# EAGLE board PCB v45 (EAGLE 9.7.0)
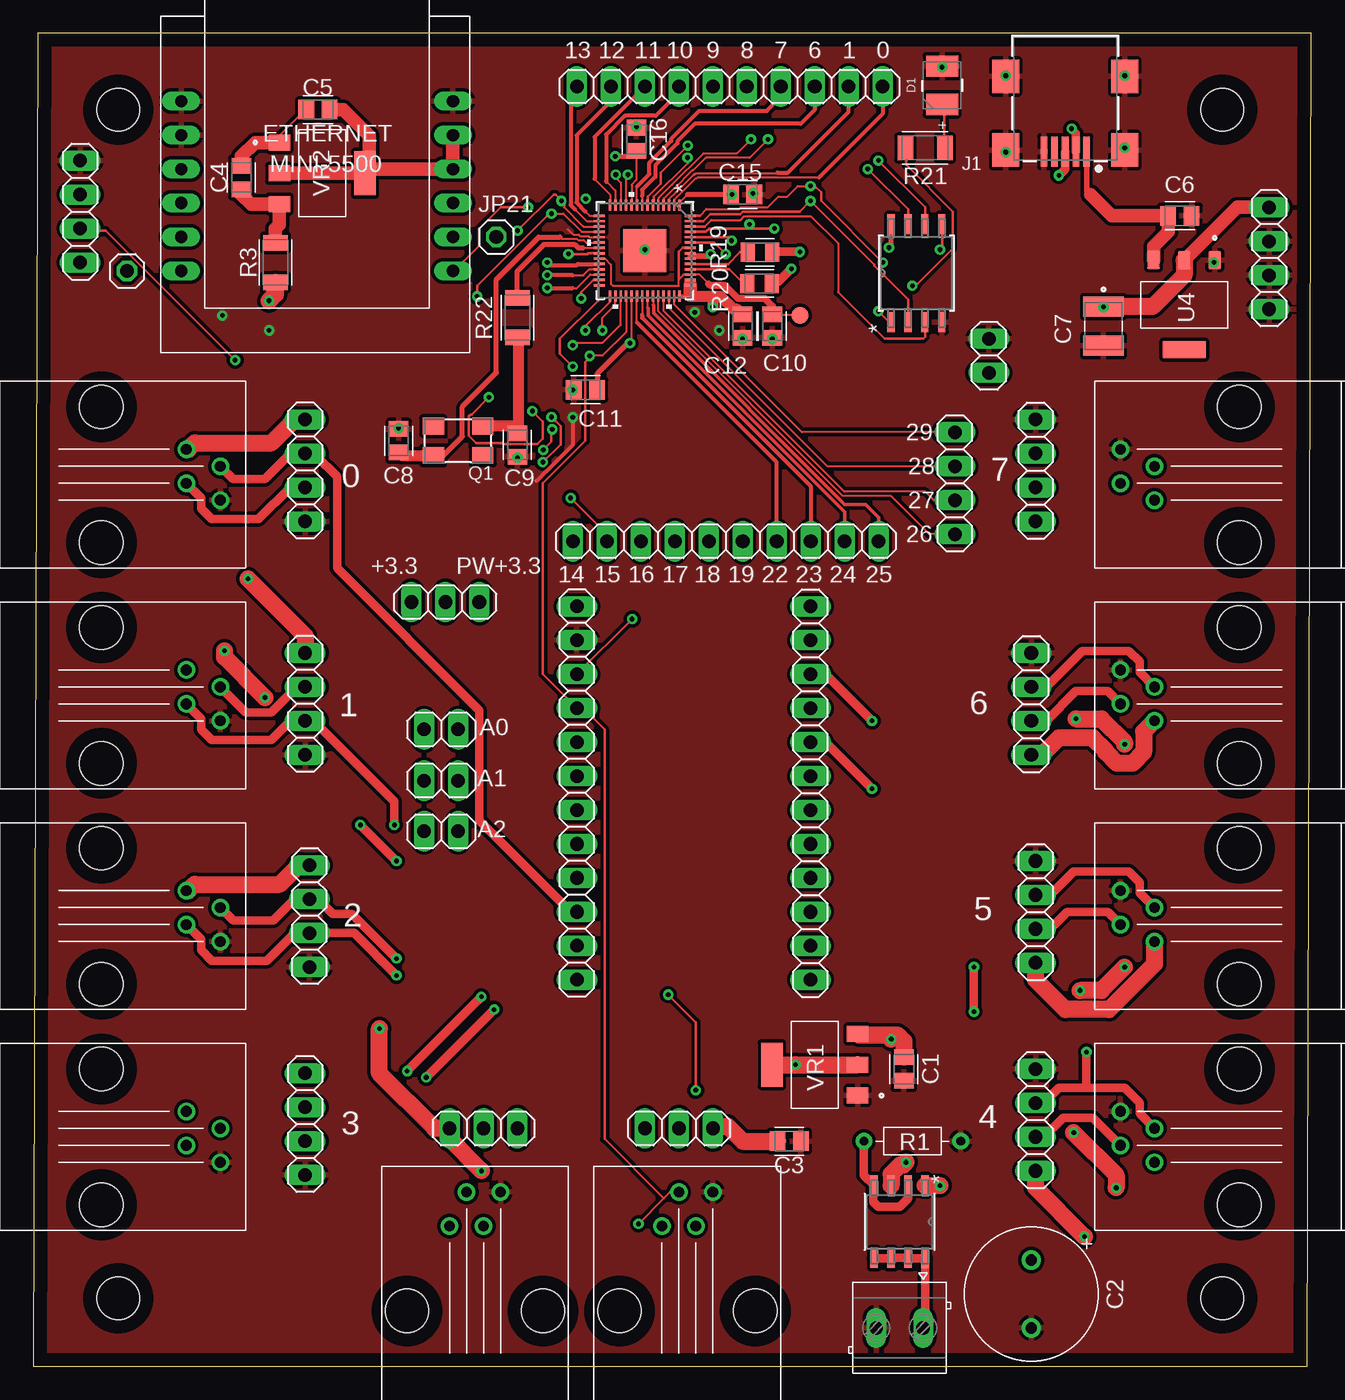
[diagram p0: board, top side]
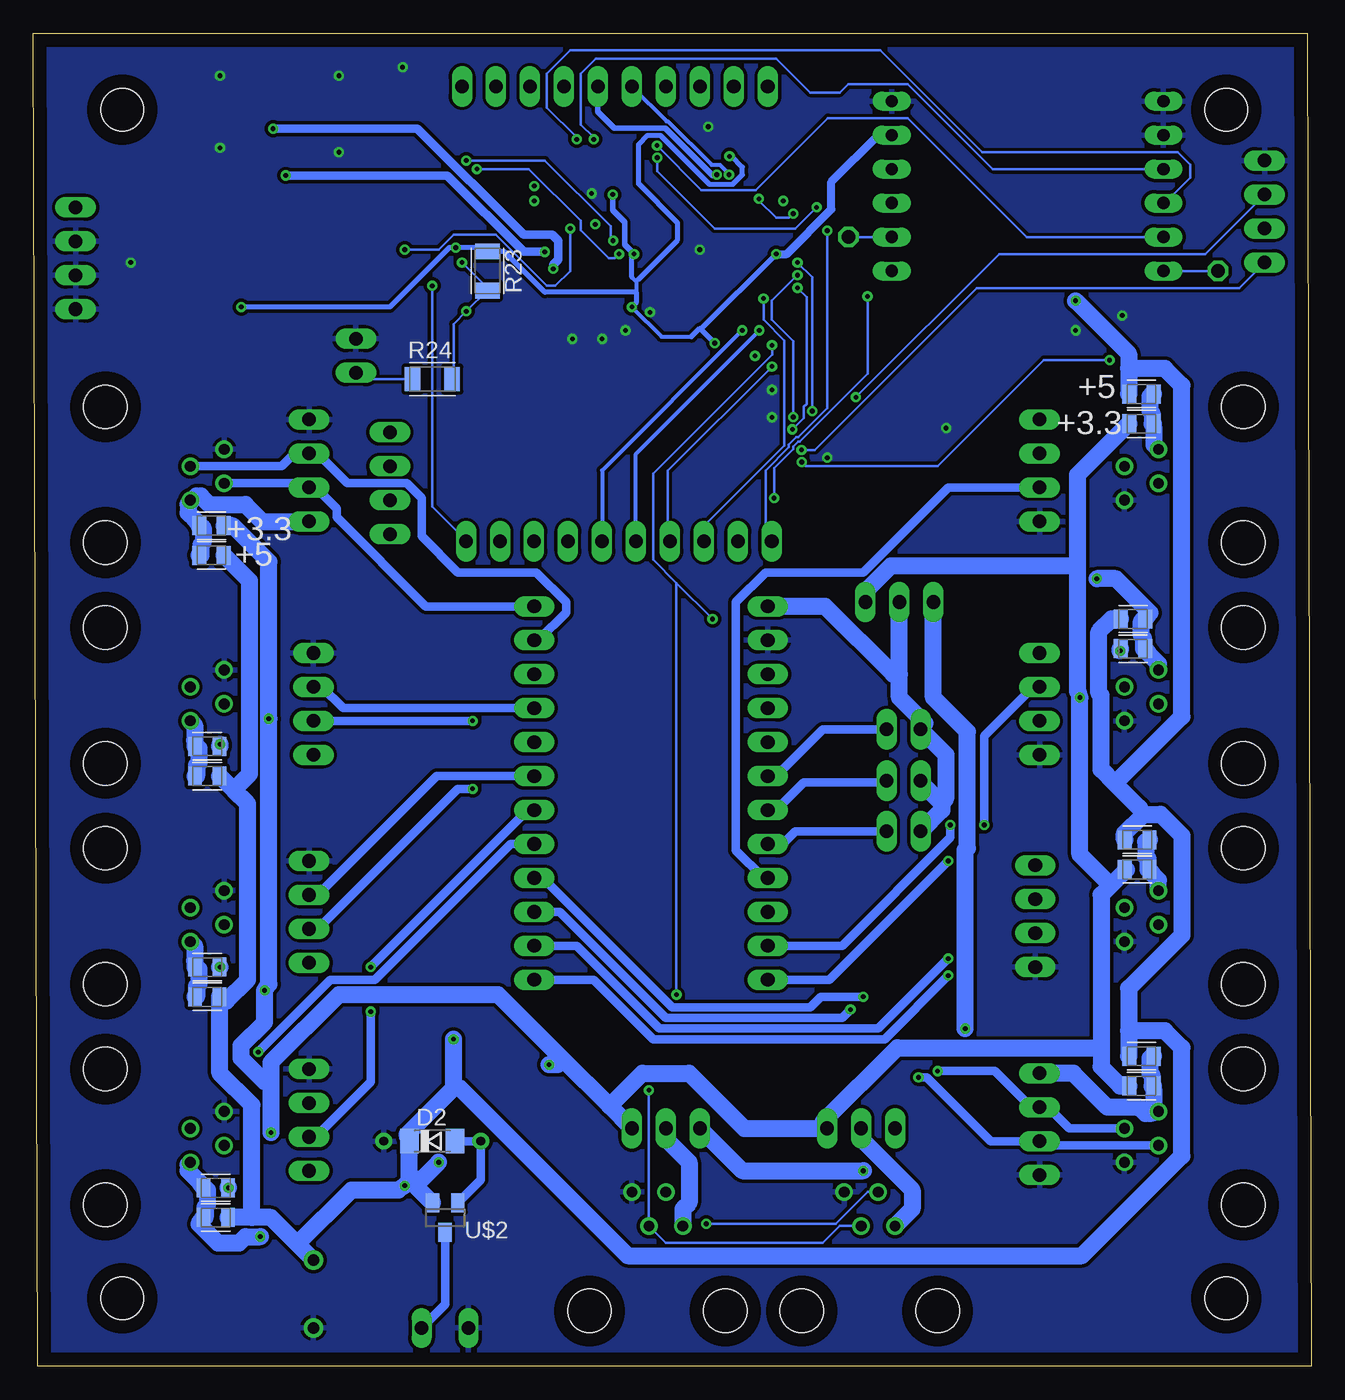
[diagram p1: board, bottom side, seen from below]

Size 95.55 x 99.68 mm. Coordinates in mm from the lower left corner, seen from the top.
Outline: 0,0 95.23,0 95.55,99.68 0.32,99.68 0,0
Copper layers (1*16): Top 0.035mm / dielectric 1.5mm / Bottom 0.035mm
Design rules "Fusion Electronics Design Rules": minimum track width 6mil, minimum drill 0.35mm, track to track 6mil, track to pad 6mil, pad to pad 6mil, via to via 6mil, smd to smd 6mil, copper to edge 40mil, drill to drill 6mil, minimum pad ring 10mil, minimum via ring 8mil, stop-mask expansion 4mil, vias tented up to drill 0mil, thermal gap 10mil
Net classes: 0 default: width 0.152 mm; 1 power: width 0.635 mm; 2 rpipow: width 0.152 mm; 3 data: width 0.305 mm; 4 pins: width 0.152 mm
Holes 3.2 mm at 6.35,5.08 88.9,93.98 6.35,93.98 88.9,5.08

## Footprints (pad centres in the part's own frame; a part is rotated, then mirrored left to right if it is on the bottom)
CAPC2012X110 = smd 1.165 x 1.465: 1 -0.875,0; 2 0.875,0
CAPPRD508W65D1000H1100B = drill 0.85 pad 1.45: 1 -2.54,0; 2 2.54,0
CAPCP3528X200N = smd 1.5 x 3.02: 1 -1.46,0; 2 1.46,0
WL-SITW_3528 = smd 1.6 x 2.4: 1 -1.425,0; 2 1.425,0
SOD80C = smd 1.4 x 1.8: A 1.7,0; C -1.7,0
651305142821 = smd 0.5 x 2.25: 1 -1.6,3.975; 2 -0.8,3.975; 3 0,3.975; 4 0.8,3.975; 5 1.6,3.975 | smd 2 x 2.5: S1 -4.45,3.85; S2 4.45,3.85; S3 -4.45,-1.65; S4 4.45,-1.65
RJ11 = drill 0.8: 1 -3.81,-2.54; 2 -6.35,-1.27; 3 -3.81,0; 4 -6.35,1.27 | hole 3.25: 2.54,-5.715; 2.54,4.445
1X12 = drill 1.016 long: 1 -13.97,0; 2 -11.43,0; 3 -8.89,0; 4 -6.35,0; 5 -3.81,0; 6 -1.27,0; 7 1.27,0; 8 3.81,0; 9 6.35,0; 10 8.89,0; 11 11.43,0; 12 13.97,0
1X02 = drill 1.016 long: 1 -1.27,0; 2 1.27,0
1X03 = drill 1.016 long: 1 -2.54,0; 2 0,0; 3 2.54,0
1X04 = drill 1.016 long: 1 -3.81,0; 2 -1.27,0; 3 1.27,0; 4 3.81,0
1X10 = drill 1.016 long: 1 -11.43,0; 2 -8.89,0; 3 -6.35,0; 4 -3.81,0; 5 -1.27,0; 6 1.27,0; 7 3.81,0; 8 6.35,0; 9 8.89,0; 10 11.43,0
1X01 = drill 1.016 octagon: 1 0,0
5.0X3.2_KX-9A = smd 1.6 x 1.25: 1 -1.85,-1.1; 2 1.85,-1.1; 3 1.85,1.1; 4 -1.85,1.1
RESAD724W46L381D178B = drill 0.66 pad 1.26: 1 -3.62,0; 2 3.62,0
RESC2012X65 = smd 1.031 x 1.42: 1 -0.919,0; 2 0.919,0
RESC3216X70 = smd 1.165 x 1.815: 1 -1.475,0; 2 1.475,0
B1,27 = smd 1.27 x 1.27: TP 0,0
SOIC-N-8_SI_VIS = smd 1.46 x 0.559: 1 -2.724,1.905; 2 -2.724,0.635; 3 -2.724,-0.635; 4 -2.724,-1.905; 5 2.724,-1.905; 6 2.724,-0.635; 7 2.724,0.635; 8 2.724,1.905
IC57_RP2040 = smd 0.813 x 0.178: 1 -3.404,2.6; 2 -3.404,2.2; 3 -3.404,1.8; 4 -3.404,1.4; 5 -3.404,1; 6 -3.404,0.6; 7 -3.404,0.2; 8 -3.404,-0.2; 9 -3.404,-0.6; 10 -3.404,-1; 11 -3.404,-1.4; 12 -3.404,-1.8; 13 -3.404,-2.2; 14 -3.404,-2.6; 29 3.404,-2.6; 30 3.404,-2.2; 31 3.404,-1.8; 32 3.404,-1.4; 33 3.404,-1; 34 3.404,-0.6; 35 3.404,-0.2; 36 3.404,0.2; 37 3.404,0.6; 38 3.404,1; 39 3.404,1.4; 40 3.404,1.8; 41 3.404,2.2; 42 3.404,2.6 | smd 0.178 x 0.813: 15 -2.6,-3.404; 16 -2.2,-3.404; 17 -1.8,-3.404; 18 -1.4,-3.404; 19 -1,-3.404; 20 -0.6,-3.404; 21 -0.2,-3.404; 22 0.2,-3.404; 23 0.6,-3.404; 24 1,-3.404; 25 1.4,-3.404; 26 1.8,-3.404; 27 2.2,-3.404; 28 2.6,-3.404; 43 2.6,3.404; 44 2.2,3.404; 45 1.8,3.404; 46 1.4,3.404; 47 1,3.404; 48 0.6,3.404; 49 0.2,3.404; 50 -0.2,3.404; 51 -0.6,3.404; 52 -1,3.404; 53 -1.4,3.404; 54 -1.8,3.404; 55 -2.2,3.404; 56 -2.6,3.404 | smd 3.2 x 3.2: 57 0,0
WIN_SS-8_WIN = smd 1.499 x 0.533: 1 -3.658,1.905; 2 -3.658,0.635; 3 -3.658,-0.635; 4 -3.658,-1.905; 5 3.658,-1.905; 6 3.658,-0.635; 7 3.658,0.635; 8 3.658,1.905
SOT229P700X180-4N = smd 1.31 x 0.93: 1 -3.345,2.29; 2 -3.345,0; 3 -3.345,-2.29 | smd 1.31 x 3.24: 4 3.345,0
MINI_W5500 = drill 0.914 long: 3V3 21.844,-8.89; 3V3.2 21.844,-11.43; CS 1.524,-16.51; GND 1.524,-6.35; GND.2 1.524,-8.89; GND.3 21.844,-6.35; INT 1.524,-19.05; MISO 21.844,-19.05; MOSI 1.524,-11.43; NC 21.844,-13.97; RST 21.844,-16.51; SCLK 1.524,-13.97
SOT23 = smd 1 x 1.4: 1 -0.95,-1.1; 2 0.95,-1.1; 3 0,1.1
VREG_TS1117BCW33_RPG = smd 1.6 x 1.2: 1 -3.2,2.3; 2 -3.2,0; 3 -3.2,-2.3 | smd 1.6 x 3.3: 4 3.2,0
DG350-3.5-02P = drill 1 long: 1 -1.75,0; 2 1.75,0

## Placement (x,y rotation side)
C1  [CAPC2012X110]  65.09,22.23 270 top
C2  [CAPPRD508W65D1000H1100B]  74.61,5.4 270 top
C3  [CAPC2012X110]  56.52,16.83 0 top
C4  [CAPC2012X110]  15.56,88.9 90 top
C5  [CAPC2012X110]  21.27,93.98 180 top
C6  [CAPC2012X110]  85.72,86.04 0 top
C7  F950J227MBAAQ2  [CAPCP3528X200N]  80.01,77.79 270 top
C8  [CAPC2012X110]  27.3,69.22 270 top
C9  [CAPC2012X110]  36.2,68.9 90 top
C10  [CAPC2012X110]  55.24,77.79 270 top
C11  [CAPC2012X110]  41.27,73.03 180 top
C12  [CAPC2012X110]  53.02,77.79 90 top
C15  [CAPC2012X110]  53.02,87.63 180 top
C16  [CAPC2012X110]  45.09,91.76 270 top
D1  15414185BA210  [WL-SITW_3528]  67.94,95.81 90 top
D2  [SOD80C]  65.72,16.83 0 bottom
J1  651305142821  [651305142821]  77.15,94.81 180 top
J2  RJ11  [RJ11]  7.62,66.04 180 top
J3  RJ11  [RJ11]  7.62,49.53 180 top
J4  RJ11  [RJ11]  7.62,33.02 180 top
J5  RJ11  [RJ11]  7.62,16.51 180 top
J6  RJ11  [RJ11]  87.63,17.78 0 top
J7  RJ11  [RJ11]  87.63,34.29 0 top
J8  RJ11  [RJ11]  87.63,50.8 0 top
J9  RJ11  [RJ11]  87.63,67.31 0 top
J10  RJ11  [RJ11]  49.53,6.67 270 top
J11  RJ11  [RJ11]  33.66,6.67 270 top
JP1  [1X12]  58.1,42.86 90 top
JP2  [1X12]  40.64,42.86 270 top
JP3  [1X02]  30.48,47.62 0 top
JP4  [1X02]  30.48,43.79 0 top
JP5  [1X02]  30.48,40.01 0 top
JP6  [1X03]  48.26,17.78 0 top
JP7  [1X03]  30.8,57.15 180 top
JP8  [1X03]  33.66,17.78 0 top
JP9  [1X04]  20.32,66.99 270 top
JP10  [1X04]  20.32,49.53 270 top
JP11  [1X04]  20.64,33.66 270 top
JP12  [1X04]  20.32,18.1 270 top
JP13  [1X04]  74.93,18.41 90 top
JP14  [1X04]  74.93,33.97 90 top
JP15  [1X04]  74.61,49.53 90 top
JP16  [1X04]  74.93,66.99 90 top
JP17  [1X02]  71.44,75.56 270 top
JP18  [1X10]  52.07,95.71 180 top
JP19  [1X10]  51.77,61.7 0 top
JP20  [1X04]  68.9,66.04 90 top
JP21  [1X01]  34.61,84.45 0 top
JP22  [1X01]  6.99,81.92 0 top
JP23  [1X04]  92.39,82.87 270 top
JP24  [1X04]  3.49,86.36 90 top
Q1  [5.0X3.2_KX-9A]  31.75,69.22 180 top
R1  [RESAD724W46L381D178B]  65.72,16.83 180 top
R2  [RESC2012X65]  12.7,70.48 0 bottom
R3  [RESC3216X70]  18.1,82.55 90 top
R4  [RESC2012X65]  12.7,72.71 0 bottom
R5  [RESC2012X65]  13.34,53.66 0 bottom
R6  [RESC2012X65]  13.34,55.88 0 bottom
R7  [RESC2012X65]  13.02,37.15 0 bottom
R8  [RESC2012X65]  13.02,39.37 0 bottom
R9  [RESC2012X65]  12.7,20.95 0 bottom
R10  [RESC2012X65]  12.7,23.18 0 bottom
R11  [RESC2012X65]  81.92,13.34 180 bottom
R12  [RESC2012X65]  81.92,11.11 180 bottom
R13  [RESC2012X65]  82.55,29.84 180 bottom
R14  [RESC2012X65]  82.55,27.62 180 bottom
R15  [RESC2012X65]  82.55,46.35 180 bottom
R16  [RESC2012X65]  82.55,44.13 180 bottom
R17  [RESC2012X65]  82.23,62.87 180 bottom
R18  [RESC2012X65]  82.23,60.64 180 bottom
R19  [RESC2012X65]  54.33,83.31 0 top
R20  [RESC2012X65]  54.29,80.97 0 top
R21  [RESC3216X70]  66.67,91.12 0 top
R22  [RESC3216X70]  36.2,78.42 90 top
R23  [RESC3216X70]  61.59,81.92 90 bottom
R24  [RESC3216X70]  65.72,73.82 0 bottom
TP1  PTR1B1,27  [B1,27]  57.31,78.58 0 top
U1  SI9934BDY-T1-E3SOIC-N-8_SI_VIS  [SOIC-N-8_SI_VIS]  64.77,10.79 270 top
U2  RP2040IC57_RP2040  [IC57_RP2040]  45.72,83.44 270 top
U3  W25Q64FVSSIGWIN_SS-8_WIN  [WIN_SS-8_WIN]  66.02,81.75 90 top
U4  AMS1117-3.3  [SOT229P700X180-4N]  86.04,79.38 270 top
U$1  MINI_W5500  [MINI_W5500]  9.53,100.97 0 top
U$2  AO3401  [SOT23]  64.77,11.11 180 bottom
VR1  TS1117BCW33_RPG  [VREG_TS1117BCW33_RPG]  58.42,22.54 180 top
VR2  TS1117BCW33_RPG  [VREG_TS1117BCW33_RPG]  21.59,89.22 0 top
X1  DG3XX-02-3.5  [DG350-3.5-02P]  64.77,2.86 180 top

## Library data of the parts
C1-C6 C8-C12 C15 C16 = Capacitor; CATEGORY: Capacitor
C7 = F950J227MBAAQ2; AVAILABILITY: In Stock; CHECK_PRICES: https://www.snapeda.com/parts/F950J227MBAAQ2/Kyocera/view-part/?ref=eda; DESCRIPTION: Cap Tant Solid 220uF 6.3V B CASE 20% (3.5 X 2.8 X 1.8mm) Pad SMD 3528-20 0.4 Ohm 125°C T/R; MF: KYOCERA AVX; MP: F950J227MBAAQ2; PACKAGE: 3528 AVX; PRICE: None; SNAPEDA_LINK: https://www.snapeda.com/parts/F950J227MBAAQ2/Kyocera/view-part/?ref=snap
D1 = Wurth_Infrared_WL-SITW; CENTROID-WAVELENGTH: 845nm; CENTROID-WAVELENGTH-MIN: 5mW/sr; CENTROID-WAVELENGTH-TYP: 9mW/sr; CHIP-TECHNOLOGY: AlGaAs; DATASHEET-URL: https://www.we-online.com/catalog/datasheet/15414185BA210.pdf; EMITTING-COLOR: Infrared; FORWARD-VOLTAGE-MAX: 2V; FORWARD-VOLTAGE-TYP: 1.5V; HEIGHT: 1.9mm; PART-NUMBER: 15414185BA210; PEAK-WAVELENGTH: 850nm; VIEWING-ANGLE: 120°
D2 = diode
J1 = Wurth_Connectors_WR-USB; APPLICATION: Mini USB; DATASHEET-URL: https://www.we-online.com/redexpert/spec/651305142821?ae; GERDER: Receptacle; INTERFACE-TYPE: TypeAB; IR: 1A; MOUNT: SMT; PACKAGING: Tape and Reel; PART-NUMBER: 651305142821; PINS: 5; TYPE: Horizontal; WORKING-VOLTAGE: 30V(AC)
J2-J11 = con-rj
JP1-JP24 = pinhead
Q1 = crystal-geyer_V1_0
R1-R24 = Resistor; CATEGORY: Resistor; SUB-CATEGORY: Fixed
TP1 = testpad
U1 = 2025-02-21_07-23-54_Library; COPYRIGHT: Copyright (C) 2025 Ultra Librarian. All rights reserved.; MANUFACTURER_PART_NUMBER: SI9934BDY-T1-E3; MFR_NAME: Vishay
U2 = 2025-02-21_20-02-25_Library; COPYRIGHT: Copyright (C) 2025 Ultra Librarian. All rights reserved.; MANUFACTURER_PART_NUMBER: RP2040; MFR_NAME: Raspberry Pi
U3 = 2025-02-22_13-02-44_Library; COPYRIGHT: Copyright (C) 2025 Ultra Librarian. All rights reserved.; MANUFACTURER_PART_NUMBER: W25Q64FVSSIG; MFR_NAME: Winbond
U4 = AMS1117-3.3; AVAILABILITY: Not in stock; CHECK_PRICES: https://www.snapeda.com/parts/AMS1117-3.3/ams/view-part/?ref=eda; DESCRIPTION: LDO Voltage Regulators 800MA LDO LINEAR REG; MF: ams AG; MP: AMS1117-3.3; PACKAGE: SOT-223 Seeed Technology; PRICE: None; SNAPEDA_LINK: https://www.snapeda.com/parts/AMS1117-3.3/ams/view-part/?ref=snap
U$1 = ethernet-mikroavr
U$2 = AO3401; AVAILABILITY: In Stock; CHECK_PRICES: https://www.snapeda.com/parts/AO3401/Alpha/view-part/?ref=eda; DESCRIPTION: P-Channel 30 V 4A (Ta) 1.4W (Ta) Surface Mount SOT-23-3; MF: Alpha & Omega Semiconductor; MP: AO3401; PACKAGE: SOT-23-3 Alpha &amp; Omega Semiconductor; PRICE: None; SNAPEDA_LINK: https://www.snapeda.com/parts/AO3401/Alpha/view-part/?ref=snap
VR1 VR2 = TS1117BCW33_RPG; AVAILABILITY: In Stock; CHECK_PRICES: https://www.snapeda.com/parts/TS1117BCW33%20RPG/taiwan/view-part/?ref=eda; DESCRIPTION: 1A 3.3V LOW DROPOUT VOLTAGE REGULATOR; MF: Taiwan Semiconductor; MP: TS1117BCW33 RPG; PACKAGE: SOT-223 Taiwan Semiconductor; PRICE: None; SNAPEDA_LINK: https://www.snapeda.com/parts/TS1117BCW33%20RPG/taiwan/view-part/?ref=snap
X1 = degson

## Nets
0 [pins]: JP18.1 U2.2
1 [pins]: JP18.2 U2.3
6 [pins]: JP18.3 U2.8
7 [pins]: JP18.4 U2.9
8 [pins]: JP18.5 U2.11
9 [pins]: JP18.6 U2.12
10 [pins]: JP18.7 U2.13
11 [pins]: JP18.8 U2.14
12 [pins]: JP18.9 U2.15
13 [pins]: JP18.10 U2.16
14 [pins]: JP19.1 U2.17
15 [pins]: JP19.2 U2.18
16 [pins]: JP19.3 U2.27
17 [pins]: JP19.4 U2.28
18 [pins]: JP19.5 U2.29
19 [pins]: JP19.6 U2.30
22 [pins]: JP19.7 U2.34
23 [pins]: JP19.8 U2.35
24 [pins]: JP19.9 U2.36
25 [pins]: JP19.10 R21.1 U2.37
26 [pins]: JP20.1 U2.38
27 [pins]: JP20.2 U2.39
28 [pins]: JP20.3 U2.40
29 [pins]: JP20.4 U2.41
+3.3 [power]: JP6.1 JP7.3 JP8.1
+3.3_POW [power]: C3.1 JP6.3 JP7.1 JP8.3 R2.1 R5.1 R7.1 R9.1 R11.1 R13.1 R15.1 R17.1 VR1.2 VR1.4
+5 [power]: C1.1 C2.1 D2.C R3.1 R4.1 R6.1 R8.1 R10.1 R12.1 R14.1 R16.1 R18.1 U1.1 U1.3 U$2.2 VR1.3
A0 [data]: JP2.6 JP3.2
A1 [data]: JP2.7 JP4.2
A2 [data]: JP2.8 JP5.2
CS: U2.7 U$1.CS
D+ [data]: J1.3 R19.2
D- [data]: J1.2 R20.2
GND: C1.2 C2.2 C3.2 C6.2 C7.2 C8.1 C9.1 C10.2 C11.2 C12.1 C15.1 C16.1 D1.2 J1.5 J1.S1 J1.S2 J1.S3 J1.S4 J2.4 J3.4 J4.4 J5.4 J6.4 J7.4 J8.4 J9.4 J10.4 J11.4 JP2.2 JP9.4 JP10.4 JP11.4 JP12.4 JP13.4 JP14.4 JP15.4 JP16.4 JP17.1 JP23.2 JP23.3 JP23.4 JP24.4 R1.1 U2.19 U2.57 U3.4 U4.1 U$1.GND U$1.GND.2 U$1.GND.3 VR1.1 X1.2
MISO: U2.6 U$1.MISO
MOSI: U2.5 U$1.MOSI
N$1: R19.1 U2.47
N$2: C4.2 C5.2 VR2.1
N$3: D2.A R1.2 U1.2 U1.4 U$2.1
N$4: U1.5 U1.6 U1.7 U1.8 U$2.3 X1.1
N$5: JP24.1 U2.26
N$6: C4.1 R3.2 VR2.3
N$7: JP24.2 U2.25
N$8: JP22.1 U$1.INT
N$9: JP21.1 U$1.RST
N$10: JP24.3 U2.24
N$33: D1.1 R21.2
N$38: R20.1 U2.46
N$40: C6.1 J1.1 U4.3
N$43: C9.2 Q1.1 R22.1
N$44: C10.1 TP1.TP U2.23 U2.45 U2.50
N$47: JP17.2 R24.1
PINP [power]: JP2.1 JP3.1 JP4.1 JP5.1 JP7.2
POW [power]: J10.1 JP6.2
POW2 [power]: J11.1 JP8.2
PW1 [power]: J2.1 JP9.1 R2.2 R4.2
PW2 [power]: J3.1 JP10.1 R5.2 R6.2
PW3 [power]: J4.1 JP11.1 R7.2 R8.2
PW4 [power]: J5.1 JP12.1 R9.2 R10.2
PW5 [power]: J6.1 JP13.1 R11.2 R12.2
PW6 [power]: J7.1 JP14.1 R13.2 R14.2
PW7 [power]: J8.1 JP15.1 R15.2 R16.2
PW8 [power]: J9.1 JP16.1 R17.2 R18.2
QSPI_SCLK: U2.52 U3.6
QSPI_SD0: U2.53 U3.5
QSPI_SD1: U2.55 U3.2
QSPI_SD2: U2.54 U3.3
QSPI_SD3: U2.51 U3.7
QSPI_SS: R23.1 R24.2 U2.56 U3.1
RP+3.3 [rpipow]: C5.1 C7.1 C11.1 C12.2 C15.2 C16.2 JP23.1 R23.2 U2.1 U2.10 U2.22 U2.33 U2.42 U2.43 U2.44 U2.48 U2.49 U3.8 U4.2 U$1.3V3 U$1.3V3.2 VR2.2 VR2.4
RST [data]: JP2.5
SCK: U2.4 U$1.SCLK
SCL_0 [data]: J2.2 JP2.10 JP9.2
SCL_1 [data]: J3.2 JP2.12 JP10.2
SCL_2 [data]: J4.2 JP1.2 JP11.2
SCL_3 [data]: J5.2 JP1.4 JP12.2
SCL_4 [data]: J6.2 JP1.6 JP13.2
SCL_5 [data]: J7.2 JP1.8 JP14.2
SCL_6 [data]: J8.2 JP1.10 JP15.2
SCL_7 [data]: J9.2 JP1.12 JP16.2
SCL_IN: J10.2 J11.2 JP2.4 U2.32
SDA_0 [data]: J2.3 JP2.9 JP9.3
SDA_1 [data]: J3.3 JP2.11 JP10.3
SDA_2 [data]: J4.3 JP1.1 JP11.3
SDA_3 [data]: J5.3 JP1.3 JP12.3
SDA_4 [data]: J6.3 JP1.5 JP13.3
SDA_5 [data]: J7.3 JP1.7 JP14.3
SDA_6 [data]: J8.3 JP1.9 JP15.3
SDA_7 [data]: J9.3 JP1.11 JP16.3
SDA_IN: J10.3 J11.3 JP2.3 U2.31
XIN: C8.2 Q1.3 U2.20
XOUT: R22.2 U2.21

## Tracks (layer width: path | path; a pad name or v marks a point on that pad's centre or on a via)
0
  Top 0.152: U2.2 47.92,87.26 48.14,87.48 48.15,87.48 49.5,88.83 49.58,88.83 49.65,88.9 58.74,88.9
  Top 0.305: 58.74,88.9 63.5,93.66 JP18.1
1
  Top 0.152: U2.3 47.52,87.29 48.01,87.78 48.02,87.78 49.37,89.13 49.45,89.13 49.54,89.22 55.56,89.22 55.63,89.28
  Top 0.305: JP18.2 60.96,93.82 56.42,89.28 55.63,89.28
6
  Top 0.152: 45.52,87.54 U2.8
  Top 0.305: JP18.3 58.42,93.98 57.36,92.92 49.46,92.92 48.16,91.62 48.16,91.46 46.51,89.81 46.51,88.97 45.52,87.98 45.52,87.54
7
  Top 0.152: U2.9 45.12,88.22
  Top 0.305: JP18.4 55.88,94.93 54.83,93.89 49.78,93.89 47.7,91.81 47.7,91.65 46.05,90 46.05,89.15 45.12,88.22
8  (via drill 0.35)
  Top 0.152: U2.11 44.32,88.93 44.45,89.06 v44.45,89.12
  Bottom 0.305: 44.45,89.06 v44.45,89.12
  Bottom 0.406: JP18.5 53.34,93.82 52.12,92.6 48.32,92.6 44.77,89.06 44.45,89.06
9  (via drill 0.35)
  Top 0.152: U2.12 43.92,88.52 43.54,88.9 v43.54,89.12
  Bottom 0.305: v43.54,89.12 43.54,89.18 44.21,89.85 44.85,89.85 48.1,93.11 48.2,93.11 JP18.6
10
  Top 0.152: U2.13 43.52,87.92 42.86,88.58
  Top 0.305: JP18.7 48.26,95.25 46.53,93.52 44.23,93.52 42.81,92.11 42.81,88.63 42.86,88.58
11
  Top 0.152: U2.14 43.12,87.64 41.96,88.79
  Top 0.305: JP18.8 41.96,91.96 41.96,88.79
12
  Top 0.152: U2.15 41.6,86.04 41.27,86.36
  Top 0.305: JP18.9 43.18,94.61 40.62,92.06 40.62,87.03 40.94,86.71 40.94,86.7 41.27,86.36
13
  Top 0.152: 40.48,86.52 41.36,85.64 U2.16
  Top 0.305: JP18.10 40.16,95.24 40.16,86.84 40.48,86.52
14  (via drill 0.35)
  Top 0.152: U2.17 41.13,85.24 39.69,86.68 39.69,87.15
  Top 0.178: v36.2,84.93 38.89,87.63 39.05,87.63 39.53,87.15 39.69,87.15 v39.48,87.15
  Bottom 0.178: JP19.1 40.48,61.75 40.8,62.07 40.8,66.99 39.07,68.72 39.07,68.92 38.49,69.49 38.38,69.49 36.2,71.67 v36.2,84.93
15  (via drill 0.35)
  Top 0.152: U2.18 40.98,84.84 39.62,86.2 v38.73,86.2
  Top 0.178: v38.73,86.2 38.58,86.2 33.18,80.8 v33.18,80.01 | v40.16,64.93 42.86,62.23 42.86,61.75 JP19.2
  Bottom 0.178: v38.73,86.2 39.05,85.88 40.01,85.88 41.3,87.18 v41.3,87.31 | v40.16,64.93 40.16,67.15 38.74,68.58 38.74,68.78 38.36,69.16 38.24,69.16 33.18,74.22 v33.18,80.01
16  (via drill 0.35)
  Top 0.178: v40.96,79.85 40.96,80.33 41.91,81.28 42.23,81.28 U2.27
  Bottom 0.178: v40.96,79.85 40.96,78.26 39.41,76.72 39.41,68.85 45.4,62.87 45.4,61.75 JP19.3
17  (via drill 0.35)
  Top 0.178: v40.32,74.77 39.37,75.72 39.37,76.83 42.23,79.69 42.23,80.8 U2.28
  Bottom 0.178: v40.32,74.77 48.1,66.99 48.1,61.75 JP19.4
18  (via drill 0.35)
  Top 0.152: U2.29 43.12,79.63 41.27,77.79 v41.27,77.47
  Bottom 0.305: v41.27,77.47 41.27,77.46 50.5,68.23 JP19.5
19  (via drill 0.35)
  Top 0.152: U2.30 43.52,79.4 42.55,78.42 v42.55,77.47
  Bottom 0.178: 53.02,62.23 53.02,61.75 JP19.6
  Bottom 0.305: v42.55,77.47 53.02,66.99 53.02,62.23
22
  Top 0.152: 45.12,78.07 U2.34
  Top 0.305: 45.12,78.07 55.58,67.61 JP19.7
23
  Top 0.152: U2.35 45.52,78.62
  Top 0.305: JP19.8 58.12,65.81 45.52,78.41 45.52,78.62
24
  Top 0.152: 45.92,79.17 U2.36
  Top 0.254: 45.92,79.17 45.96,79.14 45.96,78.58 60.66,63.88 JP19.9
25  (via drill 0.35)
  Top 0.152: U2.37 46.35,80 46.35,79.38
  Top 0.178: R21.1 65.25,91.12 65.25,89.85 68.74,86.36 68.74,83.58 65.96,80.8 v65.72,80.8
  Top 0.254: JP19.10 63.2,63.48 62.23,64.45 60.66,64.45 46.36,78.75 46.36,79.37 46.35,79.38
  Bottom 0.178: v65.72,80.8 65.72,64.29 63.18,61.75 JP19.10
26
  Top 0.152: JP20.1 66.99,62.23 64.14,65.09 60.53,65.09 46.72,78.9 U2.38
27
  Top 0.152: U2.39 47.12,78.93 60.64,65.41 66.67,65.41 67.31,64.77 JP20.2
28
  Top 0.152: JP20.3 59.37,67.31 47.52,79.16 U2.40
29
  Top 0.152: U2.41 47.92,79.4 57.47,69.85 JP20.4
+3.3  (via drill 0.35)
  Top 1.27: v33.5,14.61 31.11,16.99 JP8.1 30,17.78 25.88,21.91 v25.88,25.24
  Bottom 1.27: v33.5,14.61 42.55,14.61 JP6.1 | JP7.3 28.26,50.01 25.72,47.47 25.72,38.73 25.88,38.58 v25.88,25.24
+3.3_POW  (via drill 0.35)
  Top 1.27: VR1.4 v56.99,22.54 VR1.2 | v80.96,13.34 80.96,14.29 v77.79,17.46 | v81.6,29.84 79.85,28.1 v78.26,28.1 | v81.6,46.51 81.6,46.67 79.85,48.42 v77.95,48.42 | C3.1 53.02,16.83 51.91,17.94 50.96,17.94 JP6.3 | v14.29,53.5 14.29,53.02 v17.3,50.01
  Bottom 1.27: R9.1 14.29,20.95 15.72,22.38 15.72,23.81 | 15.72,23.81 15.72,35.24 15,35.96 | 15,35.96 13.81,37.15 R7.1 | R5.1 14.29,53.62 v14.29,53.5 | 15,35.96 17.3,38.26 v17.3,50.01 17.46,50.48 17.46,59.85 | 17.46,59.85 17.46,66.67 13.65,70.48 R2.1 | JP7.1 33.34,57.94 31.43,59.85 17.46,59.85 | 77.79,21.27 77.79,22.7 72.71,27.78 60.8,27.78 55.96,22.94 | 77.79,21.27 v77.79,17.46 | JP6.3 52.47,19.45 | 52.47,19.45 55.96,22.94 | v80.96,13.34 R11.1 | v81.6,29.84 R13.1 | 77.79,21.27 78.26,21.27 80.01,23.02 80.01,23.97 78.26,25.72 v78.26,28.1 77.95,28.57 v77.95,48.42 77.95,60.17 80.64,62.87 R17.1 | v81.6,46.51 81.6,46.35 R15.1 | 52.47,19.45 50.01,21.91 46.51,21.91 42.39,17.78 JP8.3 36.51,18.26 30.96,23.81 15.72,23.81 | v56.99,22.54 56.36,22.54 55.96,22.94
+5  (via drill 0.35)
  Top 1.27: v17.62,79.69 18.1,80.17 R3.1 | C1.1 65.09,24.29 64.61,24.77 | 64.61,24.77 61.75,24.77 VR1.3 | v67.79,13.49 66.67,13.49 U1.1 | v64.14,24.45 64.61,24.77 | v65.25,15.24 65.04,15.04 64.8,15.04 64.14,14.37 U1.3
  Bottom 1.27: 13.65,74.61 13.65,75.72 v17.62,79.69 | 13.65,74.61 13.65,72.71 R4.1 | 13.65,25.08 13.65,28.26 9.68,32.23 9.68,39.69 11.27,41.27 12.54,41.27 | 13.65,25.08 13.65,23.18 R10.1 | 12.54,41.27 13.97,39.85 13.97,39.37 R8.1 | R6.1 14.92,55.88 15.88,54.93 15.88,50.32 15.72,50.16 15.72,44.61 14.68,43.58 | 14.68,43.58 12.86,41.75 12.54,41.27 | 13.65,74.61 10.95,74.61 9.68,73.34 9.68,48.58 14.68,43.58 | 67.39,13.89 67.47,13.97 67.47,16.83 D2.C 67.63,17.3 64.14,20.8 | 67.39,13.89 67.07,13.57 | 67.07,13.57 65.72,12.22 U$2.2 | v65.25,15.24 66.52,13.97 66.67,13.97 67.07,13.57 | 67.39,13.89 v67.79,13.49 68.26,13.18 71.75,13.18 75.8,9.13 | 64.14,20.8 v64.14,24.45 | 79.22,11.11 77.79,11.11 75.8,9.13 | 79.22,11.11 R12.1 | C2.1 75.8,9.13 | 79.22,11.11 79.22,19.53 81.6,21.91 81.6,27.62 R14.1 81.12,27.3 79.53,28.89 79.53,42.07 80.57,43.1 | 80.57,43.1 81.6,44.13 R16.1 | 80.57,43.1 79.38,44.29 79.38,58.74 81.28,60.64 R18.1 | 13.65,25.08 10.95,25.08 9.68,23.81 9.68,15.72 17.14,8.26 51.12,8.26 63.66,20.8 64.14,20.8
A0
  Bottom 0.635: JP3.2 36.51,47.62 40.01,44.13 JP2.6
A1
  Bottom 0.635: JP2.7 40.01,41.59 37.94,43.66 31.75,43.66 JP4.2
A2
  Bottom 0.635: JP5.2 38.58,40.01 39.53,39.05 JP2.8
CS  (via drill 0.35)
  Top 0.178: U2.7 45.92,87.47 46.9,88.45 46.9,89.25 48.92,91.28 v48.92,91.3
  Bottom 0.178: U$1.CS 21.27,84.45 30.16,93.34 36.15,93.34 41.52,87.97 45.61,87.97 48.92,91.28 v48.92,91.3
D+  (via drill 0.35)
  Top 0.635: v76.68,89.06 77.15,89.53 J1.3 | v57.31,83.34 55.28,83.34 R19.2
  Bottom 0.635: v76.68,89.06 64.61,89.06 58.9,83.34 v57.31,83.34
D-  (via drill 0.35)
  Top 0.635: v56.67,82.07 55.67,81.07 R20.2 | v77.63,92.55 77.95,92.23 77.95,90.96 J1.2
  Bottom 0.635: v56.67,82.07 56.67,82.39 56.3,82.76 56.3,84.17 56.74,84.61 58.9,84.61 66.83,92.55 v77.63,92.55
GND  (via drill 0.35)
  Top 0.152: U2.19 41.61,84.44 41.51,84.53 40.86,84.53 40.76,84.63 40.35,84.63 39.95,85.03
  Top 0.305: 37.62,66.2 38.36,66.94 38.38,66.94 40.32,68.88 v40.32,70.96
  other vias: 45.72,83.5 45.09,92.71 53.02,76.83 55.24,76.83 40.32,73.03 36.2,67.94 27.3,70.17 67.94,97.16 72.71,96.52 72.71,90.81 81.6,96.52 81.6,91.12 88.27,82.55 14.13,78.58 17.62,77.47 51.28,77.47 53.81,87.71 49.44,78.83
  pour Top (isolate 0.254): 0.2,0.2 95.05,0.2 95.05,99.49 0.2,99.49
  pour Bottom (isolate 0.254): 0.2,0.2 95.05,0.2 95.05,99.49 0.2,99.49
MISO  (via drill 0.35)
  Top 0.178: v36.99,86.68 34.92,86.68 33.34,85.09 33.34,83.82 31.43,81.92 U$1.MISO | U2.6 46.39,86.91 46.39,87.47 48.91,89.99 v48.91,90.39
  Bottom 0.178: v36.99,86.68 38.58,85.09 44.61,85.09 48.91,89.39 v48.91,90.39
MOSI  (via drill 0.35)
  Top 0.152: U2.5 46.72,87.35 47.76,88.39 47.77,88.39 50.07,90.69 52.59,90.69 v53.66,91.76
  Bottom 0.178: U$1.MOSI 23.81,89.53 30.16,95.89 34.61,95.89 35.24,95.25 37.47,95.25 40.01,97.79 53.5,97.79 54.61,96.68 54.61,92.87 53.66,91.92 v53.66,91.76
N$1
  Top 0.203: U2.47 51.96,82.44 52.83,83.31 R19.1
N$2
  Top 0.178: C5.2 20.32,93.98 18.26,91.92 VR2.1
  Top 1.016: VR2.1 16.59,91.52 15.56,90.49 C4.2
N$3
  Top 0.178: 62.79,13.41 62.87,13.49 U1.4
  Top 0.635: U1.2 65.41,12.54 64.77,11.91 63.18,11.91 62.79,12.3 62.79,13.41 | U1.4 62.1,14.28 R1.2
  Bottom 0.635: D2.A R1.2 62.1,13.93 U$2.1
N$4
  Top 0.178: 66.67,8.1 U1.8 | 65.41,8.1 U1.7 | 66.67,2.86 X1.1
  Top 0.635: 66.67,8.1 66.65,8.07 U1.7 | U1.8 66.67,2.86 | U1.5 U1.6 64.16,8.1 65.41,8.1
  Bottom 0.635: X1.1 64.77,4.61 U$2.3
N$5  (via drill 0.35)
  Top 0.152: U2.26 41.63,81.64 40.64,80.64 40.32,80.64
  Top 0.178: v38.79,70.07 38.73,70.01 38.73,69.15 v38.12,68.53
  Top 0.305: v38.42,80.64 40.32,80.64
  Bottom 0.178: JP24.1 5.4,80.64 25,80.64 37.12,68.53 v38.12,68.53 | v38.79,70.07 38.77,70.07 37.94,70.89 37.94,71.75 37.73,71.97 37.73,79.96 v38.42,80.64
N$6
  Top 0.178: C4.1 15.56,87.63
  Top 1.016: R3.2 18.1,85.09 18.39,85.38 VR2.3 16.27,86.92 15.56,87.63
N$7  (via drill 0.35)
  Top 0.152: U2.25 41.56,82.04 41.12,81.6 40.32,81.6
  Top 0.178: v15.08,75.25 5.4,84.93 3.65,84.93 JP24.2 | v38.73,70.98 39.02,70.69 39.05,70.69 39.41,70.33 39.41,68.94 v38.09,67.62
  Top 0.305: 40.32,81.6 v38.42,81.6
  Bottom 0.178: v15.08,75.25 20,75.25 27.92,67.33 37.8,67.33 v38.09,67.62 | v38.73,70.98 38.73,76.68 40.34,78.28 40.34,79.68 v38.42,81.6
N$8
  Bottom 0.178: JP22.1 U$1.INT
N$9
  Bottom 0.178: JP21.1 U$1.RST
N$10  (via drill 0.35)
  Top 0.178: v37.31,71.44 38.1,70.64 38.1,69.39 37.66,68.95 35.19,68.95 35.08,69.06 33.09,69.06 32.56,69.59 32.56,71.04 32.7,71.18 32.76,71.18 v34.05,72.47
  Top 0.305: U2.24 40.7,82.44 40.6,82.34 38.62,82.34 v38.42,82.55
  Bottom 0.178: v38.42,82.55 37.31,81.44 v37.31,71.44 | JP24.3 7.94,83.19 23.34,83.19 v34.05,72.47
N$33
  Top 0.178: R21.2 68.1,91.12 68.1,94.14 67.94,94.3 D1.1
N$38
  Top 0.203: R20.1 53.1,80.97 52.03,82.04 U2.46
N$40
  Top 0.406: J1.1 78.75,87.94 79.06,87.63
  Top 1.016: 79.06,87.63 80.64,86.04 C6.1 84.85,84.85 83.75,83.75 U4.3
N$43
  Top 0.813: 35.65,70.31 C9.2 | 35.65,70.31 36.29,70.31 36.29,76.85 R22.1 | 35.65,70.31 Q1.1
N$44
  Top 0.152: 50.48,80.96 49.81,81.64 U2.45 48.62,81.64 48.26,81.28 48.26,80.8 43.34,80.8 43.18,80.96 43.18,82.39 42.75,82.82 42.34,82.82 U2.23 | C10.1 57.23,78.66 TP1.TP
  Top 0.203: U2.50 48.55,83.64 48.26,83.34 48.26,81.28
  Top 0.508: C10.1 55.24,79.3 54.69,79.85 52.69,79.85 51.72,80.82 50.62,80.82 50.48,80.96
N$47
  Bottom 0.178: R24.1 70.96,73.82 JP17.2
PINP
  Bottom 1.27: JP5.1 27.62,41.59 27.62,42.07 | 27.62,42.07 29.21,43.66 JP4.1 | 27.62,42.07 27.3,42.55 27.3,45.72 JP3.1 28.89,48.1 30.8,50.01 30.8,51.75 | 30.8,51.75 JP7.2 | JP2.1 36.35,56.83 31.27,51.75 30.8,51.75
POW
  Bottom 1.27: J10.1 46.99,11.75 46.51,12.22 46.51,15.24 48.26,16.99 JP6.2
POW2
  Bottom 1.27: J11.1 29.84,11.75 29.84,13.18 33.66,16.99 JP8.2
PW1
  Top 1.27: JP9.1 19.53,70.8 17.78,69.06 12.06,69.06 11.59,68.58 J2.1
  Bottom 1.27: R4.2 11.91,72.71 12.06,72.55 12.06,71.44 11.91,71.28 11.91,70.48 R2.2 11.75,70.01 11.75,68.9 J2.1
PW2  (via drill 0.35)
  Top 1.27: JP10.1 20.32,54.61 v16.03,58.9
  Bottom 1.27: J3.1 11.43,52.55 12.06,53.18 R5.2 12.54,53.66 12.54,54.45 12.7,54.61 12.7,55.72 12.54,55.88 R6.2 12.06,56.36 14.61,58.9 v16.03,58.9
PW3
  Top 1.27: JP11.1 19.84,37.47 18.41,36.04 12.06,36.04 11.59,35.56 J4.1
  Bottom 1.27: R8.2 12.22,39.37 12.38,39.21 12.38,38.1 12.22,37.94 12.22,37.15 R7.2 11.75,36.67 11.43,36.35 J4.1
PW4
  Bottom 1.27: R10.2 11.91,23.18 12.06,23.02 12.06,21.91 11.91,21.75 11.91,20.95 R9.2 11.75,20.48 11.75,19.37 J5.1 12.06,18.89 12.38,18.89 12.86,19.37 15.24,19.37 17.78,21.91 JP12.1
PW5  (via drill 0.35)
  Top 1.27: JP13.1 74.93,13.34 v78.58,9.68
  Bottom 1.27: J6.1 83.98,15.08 83.98,14.61 83.19,13.81 R11.2 82.71,13.34 82.55,13.18 82.55,12.06 82.71,11.91 82.71,11.11 R12.2 83.19,10.64 81.76,9.21 80.17,9.21 79.69,9.68 v78.58,9.68
PW6
  Top 1.27: JP14.1 74.93,28.89 77.15,26.67 80.43,26.67 83.82,30.06 J7.1
  Bottom 1.27: R14.2 83.34,27.62 83.34,28.42 83.19,28.57 83.19,29.69 83.34,29.84 R13.2 83.5,30.32 83.5,31.43 J7.1
PW7
  Top 1.27: JP15.1 75.41,45.72 76.68,46.99 79.22,46.99 80.17,46.03 80.17,45.92 81.01,45.09 82.19,45.09 83.02,45.92 83.02,47.46 J8.1
  Bottom 1.27: R16.2 83.34,44.13 83.34,44.93 83.19,45.09 83.19,46.2 83.34,46.35 R15.2 83.5,46.83 83.5,47.94 J8.1
PW8
  Bottom 1.27: R18.2 83.03,60.64 83.03,61.44 82.87,61.59 82.87,62.71 83.03,62.87 R17.2 83.5,63.34 83.98,63.82 83.98,64.45 83.82,64.61 J9.1 83.34,65.09 83.03,65.09 82.39,64.45 79.69,64.45 78.42,63.18 JP16.1
QSPI_SCLK  (via drill 0.35)
  Top 0.178: v63.18,90.17 66.67,86.68 66.67,85.57 U3.6
  Top 0.203: U2.52 51.95,84.44 v52.2,84.18
  Bottom 0.178: v63.18,90.17 57.31,90.17 52.39,85.25 52.39,84.36 v52.2,84.18
QSPI_SD0  (via drill 0.35)
  Top 0.178: v67.79,83.5 67.94,83.66 67.94,85.41 U3.5 | 53.02,85.09 53.98,85.09 v55.4,85.09
  Top 0.203: 53.02,85.09 50.54,85.09 50.28,84.84 U2.53 | v53.54,85.4 53.66,85.4 53.98,85.09
  Bottom 0.178: v67.79,83.5 65.25,83.5 64.14,84.61 60.96,84.61 57.15,80.8 56.52,80.8 55.4,81.92 v55.4,85.09
QSPI_SD1  (via drill 0.35)
  Top 0.178: U3.2 65.41,78.11 65.41,79.77 62.88,82.29 62.88,82.38 v58.1,87.15
  Top 0.203: U2.55 50.08,85.64 50.62,86.18 52.87,86.18 53.03,86.34 57.29,86.34 v58.1,87.15
QSPI_SD2
  Top 0.152: 60.17,80.33 60.17,83.98 58.14,86.01 53.16,86.01 52.88,85.72 50.67,85.72
  Top 0.178: U3.3 66.67,77.95 66.67,76.99 66.52,76.83 63.66,76.83 60.17,80.33
  Top 0.203: U2.54 50.18,85.24 50.67,85.72
QSPI_SD3  (via drill 0.35)
  Top 0.178: v62.39,89.53 65.41,86.52 65.41,85.57 U3.7
  Top 0.203: U2.51 50.9,84.04 v51.75,83.19
  Bottom 0.178: v51.75,83.19 52.07,82.87 52.55,82.87 54.64,84.96 54.64,85.67 58.5,89.53 v62.39,89.53
QSPI_SS  (via drill 0.35)
  Top 0.152: v58.1,88.27 57.15,88.27 56.36,87.47 55.7,87.47 54.89,86.67 52.89,86.67 52.74,86.52 50.32,86.52
  Top 0.178: v63.18,78.9 63.98,78.11 U3.1 | v58.1,88.27 58.42,88.27 58.9,87.79 58.9,87.15 v63.5,82.55
  Top 0.203: U2.56 49.84,86.04 50.32,86.52
  Bottom 0.178: 61.59,80.49 v63.18,78.9 64.14,77.95 64.14,73.82 R24.2 | v63.5,82.55 61.59,80.64 61.59,80.49 | 61.59,80.49 R23.1
RP+3.3  (via drill 0.35)
  Top 0.152: U2.33 44.72,76.79 44.45,76.52 | 45.09,90.49 45.09,88.73 44.72,88.36 U2.10
  Top 0.203: U2.1 48.32,87.06 48.9,87.63 | U2.22 41.49,83.24 41.43,83.19 v40.01,83.19
  Top 0.254: U2.49 49.12,83.03 U2.48
  Top 0.305: U2.44 U2.43 | U2.42 49.06,80.03
  Top 0.381: C11.1 42.15,74.22 44.45,76.52 v44.61,76.52 | 48.9,87.63 C15.2 v52.23,87.63 | v63.98,83.66 64.14,83.82 64.14,85.41 U3.8 | v43.5,90.49 45.09,90.49 C16.2 | v80.01,79.22 C7.1
  Top 0.406: 49.21,80.01 49.12,80.1 49.06,80.03 | 49.12,83.03 50.48,83.03 v50.64,83.19
  Top 0.813: 50.8,80.01 49.21,80.01 | 50.8,80.01 v50.8,79.22 | C12.2 52.65,79.04 52.35,79.04 51.38,80.01 50.8,80.01
  Top 1.016: U$1.3V3 U$1.3V3.2 25.11,89.53 | C5.1 23.18,93.98 25.11,92.05 25.11,89.53 | VR2.2 VR2.4 25.11,89.53 | U4.2 90,86.68 JP23.1 | U2.43 49.12,80.1
  Top 1.27: U4.2 86.04,81.6 83.69,79.25 C7.1
  Bottom 0.305: v50.8,79.22 48.58,76.99 46.35,76.99 | 50.48,81.12 50.32,81.28 | 50.48,81.12 50.48,80.33 | 50.8,81.44 50.48,81.12
  Bottom 0.381: 52.23,87.47 v52.23,87.63 | v50.64,83.19 50.8,83.03 50.8,81.44 | v50.8,79.22 50.48,79.53 50.48,80.33 57.31,80.33 60.33,83.34 61.44,83.34 R23.2 61.59,83.34 61.91,83.66 v63.98,83.66 64.45,83.66 68.9,79.22 v80.01,79.22 | v43.5,90.49 43.34,90.49 42.55,89.69 42.55,89.1 43.24,88.4 45.01,88.4 48.66,92.06 49.62,92.06 50.3,91.37 50.3,88.43 47.38,85.5 47.38,84.22 50.32,81.28 | 45.64,77.55 45.72,77.63 46.35,76.99 | 45.64,77.55 v44.61,76.52 | 45.64,77.55 v40.01,83.19
  Bottom 0.406: v50.64,83.19 51.34,83.88 51.34,85.55 52.23,86.44 52.23,87.47
  Bottom 0.61: v40.01,83.19 39.21,83.19 35.88,86.52 35.88,88.58 32.38,92.08 U$1.3V3
SCK  (via drill 0.35)
  Top 0.152: U2.4 47.12,87.32 47.88,88.09 47.9,88.09 49.25,89.44 49.33,89.44 50.27,90.38 53.55,90.38 v54.93,91.76
  Bottom 0.178: v54.93,91.76 54.93,91.92 57.15,94.14 57.15,96.68 55.4,98.42 32.23,98.42 24.61,90.81 10,90.81 9.05,89.85 9.05,88.9 10.95,87 U$1.SCLK
SCL_0
  Top 0.635: J2.2 14.92,66.36 17.3,66.36 19.21,68.26 JP9.2 20.48,68.1 21.11,68.1 22.7,66.52 22.7,59.69 33.34,49.05 33.34,40.8 40.16,33.97 JP2.10
SCL_1  (via drill 0.35)
  Top 0.635: J3.2 15.88,48.9 17.78,48.9 19.68,50.8 JP10.2 | v24.45,40.48 v27.15,37.78
  Bottom 0.635: JP2.12 36.04,28.89 v27.15,37.78 | v24.45,40.48 24.45,47.15 20.8,50.8 JP10.2
SCL_2  (via drill 0.35)
  Top 0.635: J4.2 14.92,33.34 17.94,33.34 19.53,34.92 JP11.2 20.8,34.77 21.43,34.77 22.38,33.81 23.81,33.81 v27.15,30.48
  Bottom 0.635: JP1.2 54.93,31.43 48.74,25.24 32.38,25.24 v27.15,30.48
SCL_3  (via drill 0.35)
  Top 0.635: v27.94,22.07 v33.5,27.62
  Bottom 0.635: J5.2 18.1,17.78 19.68,19.37 JP12.2 20.48,19.53 21.11,19.53 23.65,22.07 v27.94,22.07 | JP1.4 57.47,36.51 47.78,26.83 37.47,26.83 36.67,27.62 v33.5,27.62
SCL_4  (via drill 0.35)
  Top 0.635: J6.2 79.22,18.57 76.99,18.57 75.56,17.14 JP13.2 | v70.33,26.51 v70.33,29.84
  Bottom 0.635: JP1.6 58.58,41.59 v70.33,29.84 | v70.33,26.51 70.33,21.27 74.45,17.14 JP13.2
SCL_5  (via drill 0.35)
  Top 0.635: J7.2 80.33,33.97 77.31,33.97 76.04,32.7 JP14.2 | JP1.8 59.21,46.67 v62.71,43.18
  Bottom 0.635: v62.71,43.18 63.82,43.18 74.3,32.7 JP14.2
SCL_6  (via drill 0.35)
  Top 0.635: J8.2 80.33,50.48 77.95,50.48 75.72,48.26 JP15.2 | JP1.10 59.21,51.75 v62.71,48.26
  Bottom 0.635: JP15.2 v62.71,48.26
SCL_7
  Bottom 0.635: J9.2 75.25,66.04 JP16.2 74.77,65.56 74.3,65.56 72.87,64.14 72.87,63.5 66.2,56.83 JP1.12
SCL_IN  (via drill 0.35)
  Top 0.152: U2.32 44.32,77.34 42.55,75.56 41.75,75.56
  Top 0.178: 47.15,12.54 47.62,13.02 J10.2 | 47.15,12.54 v45.24,10.64 | v41.59,75.56 41.75,75.56 41.27,75.09 41.27,69.22 38.1,66.04 38.1,51.75 JP2.4 41.12,49.21 42.7,47.62 42.7,16.99 47.15,12.54
  Bottom 0.178: J11.2 33.18,13.02 35.56,10.64 v45.24,10.64
SDA_0
  Top 0.635: J2.3 12.54,64.93 12.54,64.14 13.34,63.34 16.83,63.34 19.21,65.72 JP9.3
  Bottom 0.635: JP2.9 40.96,36.51 43.02,38.58 43.02,57.15 40.8,59.37 33.5,59.37 27.15,65.72 JP9.3
SDA_1  (via drill 0.35)
  Top 0.635: J3.3 12.54,48.42 12.54,47.62 13.34,46.83 17.78,46.83 19.21,48.26 JP10.3 20.48,48.1 21.11,48.1 26.99,42.23 v26.99,40.48
  Bottom 0.635: JP2.11 35.08,31.43 26.99,39.53 v26.99,40.48
SDA_2  (via drill 0.35)
  Top 0.635: J4.3 12.54,31.91 12.54,31.11 13.34,30.32 17.46,30.32 19.53,32.38 JP11.3 23.97,32.38 v27.15,29.21
  Bottom 0.635: JP1.1 53.66,28.89 49.21,24.45 31.91,24.45 v27.15,29.21
SDA_3  (via drill 0.35)
  Top 0.635: v29.37,21.59 v34.45,26.67
  Bottom 0.635: J5.3 20,16.51 JP12.3 23.97,16.83 28.73,21.59 v29.37,21.59 | JP1.3 56.2,33.97 48.26,26.04 35.08,26.04 v34.45,26.67
SDA_4  (via drill 0.35)
  Top 0.635: J6.3 82.71,18.89 82.71,19.68 81.6,20.8 78.74,20.8 | 78.74,20.8 76.68,20.8 75.56,19.68 JP13.3 | 78.74,20.8 v78.74,23.5
  Bottom 0.635: JP1.5 59.85,39.05 70.01,28.89 73.34,28.89 v78.74,23.5
SDA_5
  Top 0.635: J7.3 82.71,35.4 82.71,36.2 81.92,36.99 77.79,36.99 76.04,35.24 JP14.3
  Bottom 0.635: JP1.7 65.41,44.13 74.3,35.24 JP14.3
SDA_6
  Top 0.635: J8.3 82.71,51.91 82.71,52.7 81.92,53.5 78.42,53.5 75.72,50.8 JP15.3
  Bottom 0.635: JP1.9 72.39,49.21 73.98,50.8 JP15.3
SDA_7
  Bottom 0.635: J9.3 76.99,67.31 76.04,68.26 JP16.3 74.77,68.1 74.14,68.1 72.07,66.04 67.63,66.04 66.52,64.93 66.52,62.07 63.82,59.37 57.94,59.37 55.72,57.15 55.72,56.36 57.78,54.29 JP1.11
SDA_IN  (via drill 0.35)
  Top 0.152: U2.31 43.92,77.89 42.55,76.52 40.64,76.52 40.48,76.36 v40.32,76.36
  Top 0.178: v44.77,55.88 JP2.3 | v49.53,20.64 49.53,25.72 v47.47,27.78
  Bottom 0.178: J11.3 35.24,10.48 36.51,9.21 48.26,9.21 J10.3 v49.53,20.64 | 47.47,58.58 49.21,60.33 49.21,66.76 40.32,75.65 v40.32,76.36 | 47.47,58.58 v44.77,55.88 | 47.47,58.58 v47.47,27.78
XIN
  Top 0.152: U2.20 41.34,84.04 41.15,84.23 40.73,84.23 40.64,84.33 39.5,84.33 39.37,84.45
  Top 0.381: 39.37,84.45 37.78,84.45 34.61,81.28 34.61,74.3 32.07,71.75 32.07,69.53 30.65,68.11 Q1.3
  Top 0.813: C8.2 27.53,68.11 Q1.3
XOUT
  Top 0.152: 41.09,83.64 U2.21
  Top 0.381: R22.2 36.2,81.92 38.19,83.91 40.46,83.91 40.73,83.64 41.09,83.64

## Text on the board
tPlace: 13 | 12 | 11 | 10 | 9 | 8 | 7 | 6 | 1 | 0 | 29 | 28 | 0 | 7 | 27 | 26 | +3.3 | PW+3.3 | 14 | 15 | 16 | 17 | 18 | 19 | 22 | 23 | 24 | 25 | 1 | 6 | A0 | A1 | A2 | 2 | 5 | 4 | 3
bPlace: +5 | +3.3 | +3.3 | +5